# EAGLE board PCB Arduino (EAGLE 7.6.0)
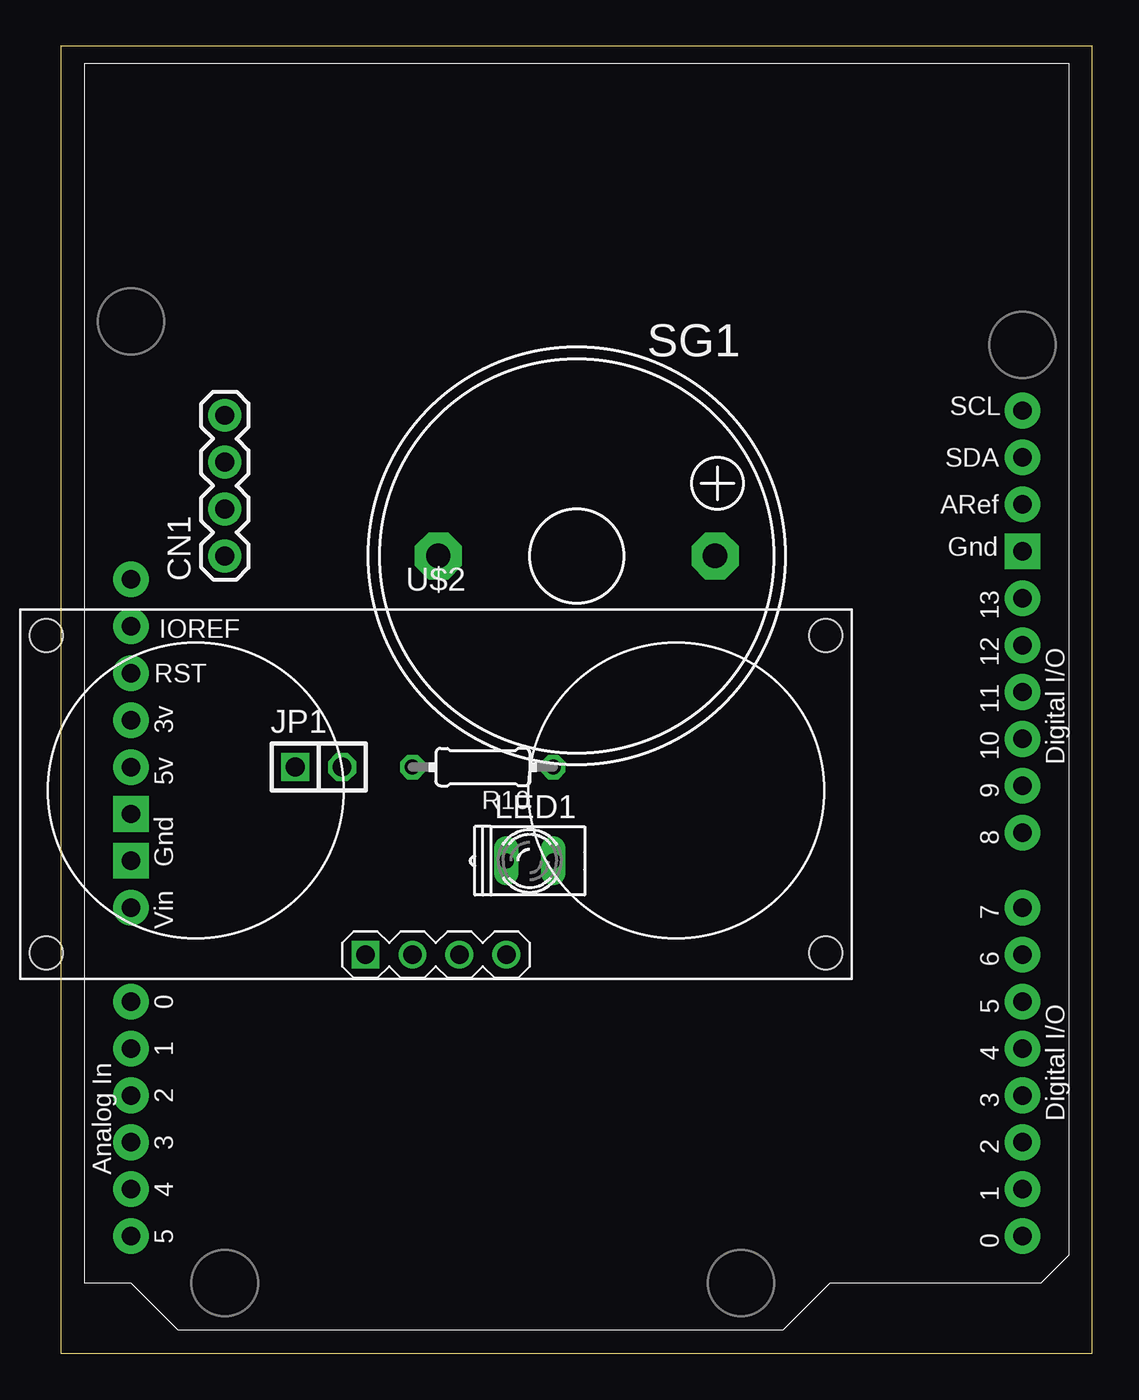
[diagram p0: board, top side]
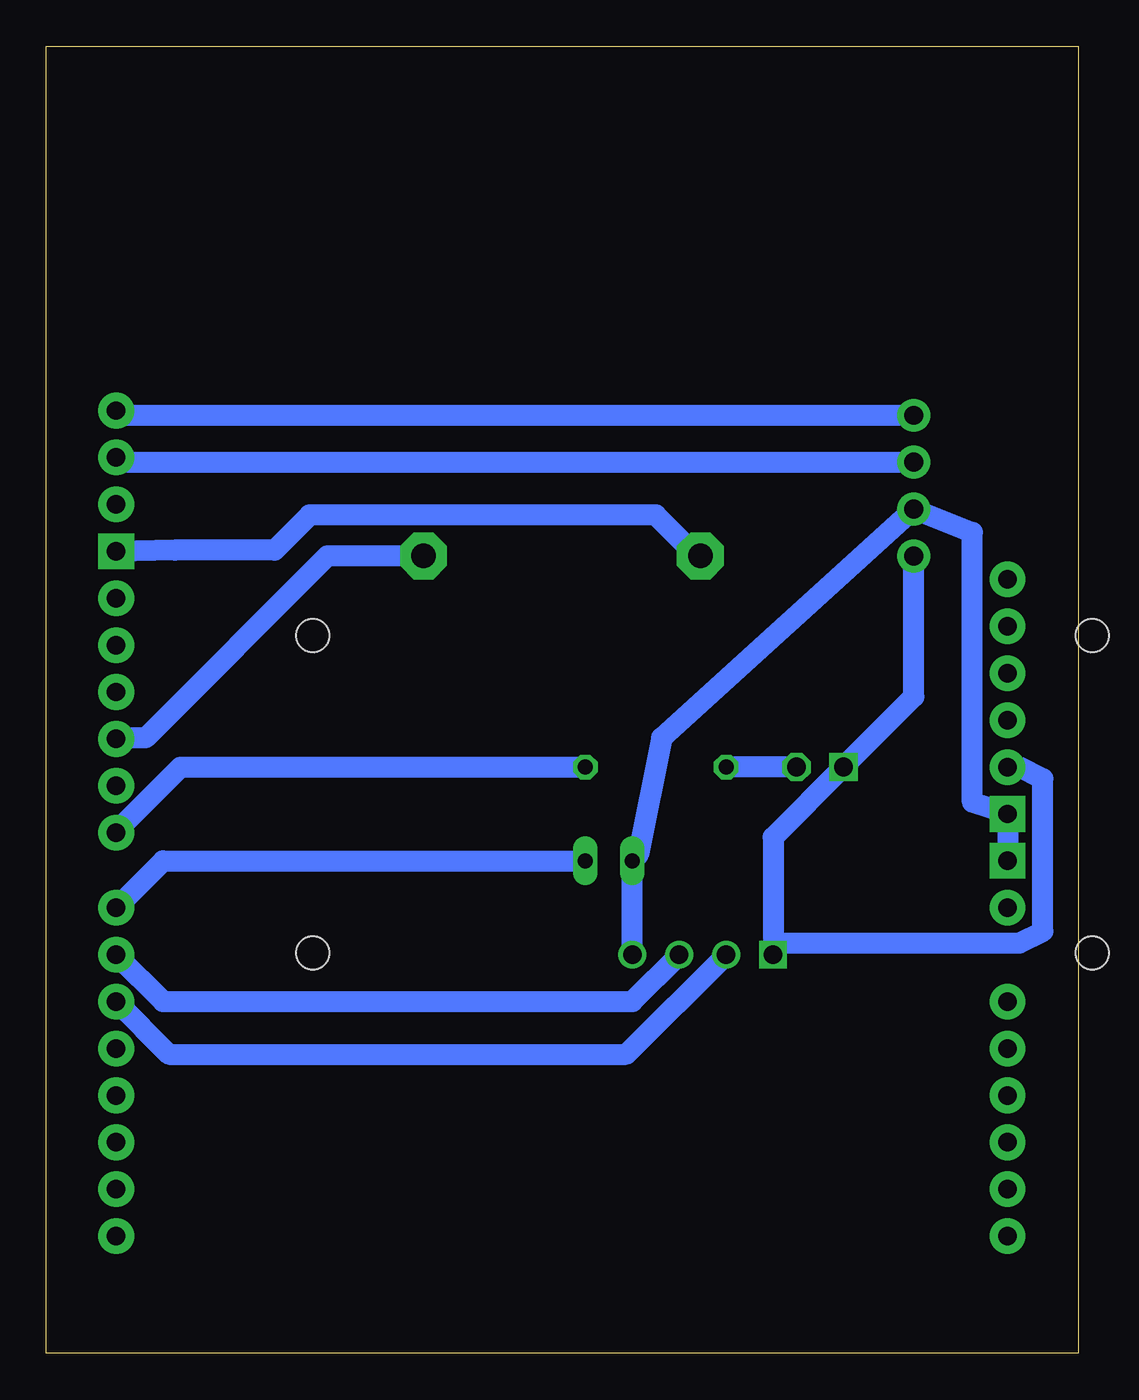
[diagram p1: board, bottom side, seen from below]

Size 55.86 x 70.79 mm. Coordinates in mm from the lower left corner, seen from the top.
Outline: 0,0 55.86,0 55.86,70.79 0,70.79 0,0
Copper layers (1*16): Top 0.035mm / dielectric 1.5mm / Bottom 0.035mm
Design rules "default *": minimum track width 50mil, minimum drill 24mil, track to track 8mil, track to pad 8mil, pad to pad 8mil, via to via 8mil, smd to smd 8mil, copper to edge 40mil, drill to drill 8mil, minimum pad ring 10mil, minimum via ring 8mil, stop-mask expansion 4mil, vias tented up to drill 0mil, thermal gap 10mil

## Footprints (pad centres in the part's own frame; a part is rotated, then mirrored left to right if it is on the bottom)
1X04-BIG = drill 1.016 pad 1.778: 1 0,0; 2 2.54,0; 3 5.08,0; 4 7.62,0
1X02 = drill 1.016 square: 1 -1.27,0 | drill 1.016 octagon: 2 1.27,0
Q62902-B152 = drill 0.813 long: A 1.27,0; K -1.27,0
0204/7 = drill 0.813 octagon: 1 -3.81,0; 2 3.81,0
EB2209A = drill 1.321 pad 2.54 octagon: + 7.493,0; - -7.493,0
ARDUINO_LEONARDO = drill 1 pad 1.93: 3V 1.27,-24.13; 5V 3.81,-24.13; A0 16.51,-24.13; A1 19.05,-24.13; A2 21.59,-24.13; A3 24.13,-24.13; A4 26.67,-24.13; A5 29.21,-24.13; AREF -10.414,24.13; D0 29.21,24.13; D1 26.67,24.13; D2 24.13,24.13; D3 21.59,24.13; D4 19.05,24.13; D5 16.51,24.13; D6 13.97,24.13; D7 11.43,24.13; D8 7.366,24.13; D9 4.826,24.13; D10 2.286,24.13; D11 -0.254,24.13; D12 -2.794,24.13; D13 -5.334,24.13; IOREF -3.81,-24.13; RESERVED -6.35,-24.13; RESET -1.27,-24.13; SCL -15.494,24.13; SDA -12.954,24.13; VIN 11.43,-24.13 | drill 1 pad 1.93 square: GND -7.874,24.13; GND$2 8.89,-24.13; GND$3 6.35,-24.13
ULTRASONIC-HC-SR04 = drill 1 square: 1 -3.81,-8.89 | drill 1: 2 -1.27,-8.89; 3 1.27,-8.89; 4 3.81,-8.89 | hole 1.8: -21.1,8.4; -21.1,-8.8; 21.1,-8.8; 21.1,8.4

## Placement (x,y rotation side)
CN1  1X4-BIG  [1X04-BIG]  8.89,43.18 90 top
JP1  [1X02]  13.97,31.75 0 top
LED1  [Q62902-B152]  25.4,26.67 0 top
R10  [0204/7]  22.86,31.75 180 top
SG1  EB2209A  [EB2209A]  27.94,43.18 0 top
U$1  ARDUINO_LEONARDO  [ARDUINO_LEONARDO]  27.94,35.56 270 top
U$2  ULTRASONIC-HC-SR04  [ULTRASONIC-HC-SR04]  20.32,30.48 0 top

## Library data of the parts
CN1 LED1 = adafruit
JP1 = pinhead
R10 = resistor
SG1 = buzzer; OC_FARNELL: unknown; OC_NEWARK: unknown
U$1 = srg
U$2 = diy-modules

## Nets
3V: U$1.3V
5V: CN1.1 JP1.1 U$1.5V U$2.1
A0: U$1.A0
A1: U$1.A1
A2: U$1.A2
A3: U$1.A3
A4: U$1.A4
A5: U$1.A5
D0: U$1.D0
D1: U$1.D1
D2: U$1.D2
D3: U$1.D3
D4: U$1.D4
D5: U$1.D5 U$2.2
D6: U$1.D6 U$2.3
D7: LED1.A U$1.D7
D8: R10.1 U$1.D8
D9: U$1.D9
D10: SG1.+ U$1.D10
D11: U$1.D11
D12: U$1.D12
D13: U$1.D13
GND: CN1.2 LED1.K U$1.GND$2 U$1.GND$3 U$2.4
GND2: SG1.- U$1.GND
N$1: JP1.2 R10.2
N$3: U$1.AREF
SCL: CN1.4 U$1.SCL
SDA: CN1.3 U$1.SDA
VIN: U$1.VIN

## Tracks (layer width: path | path; a pad name or v marks a point on that pad's centre or on a via)
5V
  Bottom 1.143: CN1.1 8.89,35.56 JP1.1 16.51,27.94 U$2.1 16.19,22.22 3.17,22.22 1.91,22.86 1.91,31.11 3.17,31.75 U$1.5V
D5
  Bottom 1.143: U$2.2 24.45,16.19 49.21,16.19 U$1.D5
D6
  Bottom 1.143: U$2.3 24.13,19.05 49.53,19.05 U$1.D6
D7
  Bottom 1.143: LED1.A 49.53,26.67 U$1.D7
D8
  Bottom 1.143: R10.1 48.58,31.75 52.07,28.26 U$1.D8
D10
  Bottom 1.143: SG1.+ 40.64,43.18 50.48,33.34 52.07,33.34 U$1.D10
GND
  Bottom 1.143: U$2.4 LED1.K 23.81,26.99 22.54,33.34 CN1.2 5.72,44.45 5.72,29.85 U$1.GND$3 U$1.GND$2
GND2
  Bottom 1.143: U$1.GND 48.9,43.5 43.5,43.5 41.59,45.4 22.86,45.4 20.64,43.18 SG1.-
N$1
  Bottom 1.143: JP1.2 R10.2
SCL
  Bottom 1.143: CN1.4 52.07,50.8 U$1.SCL
SDA
  Bottom 1.143: CN1.3 52.07,48.26 U$1.SDA